# Altium PCB BtPS-250.PcbDoc (part 2 of 2)
Units mm, origin at the board's own origin, x right, y up, seen from the top; angles counter-clockwise.
Board outline 165 x 92.4 mm, 2 copper layers (Top Layer, Bottom Layer); 145 components, 82 nets, 422 pads, 41 vias.
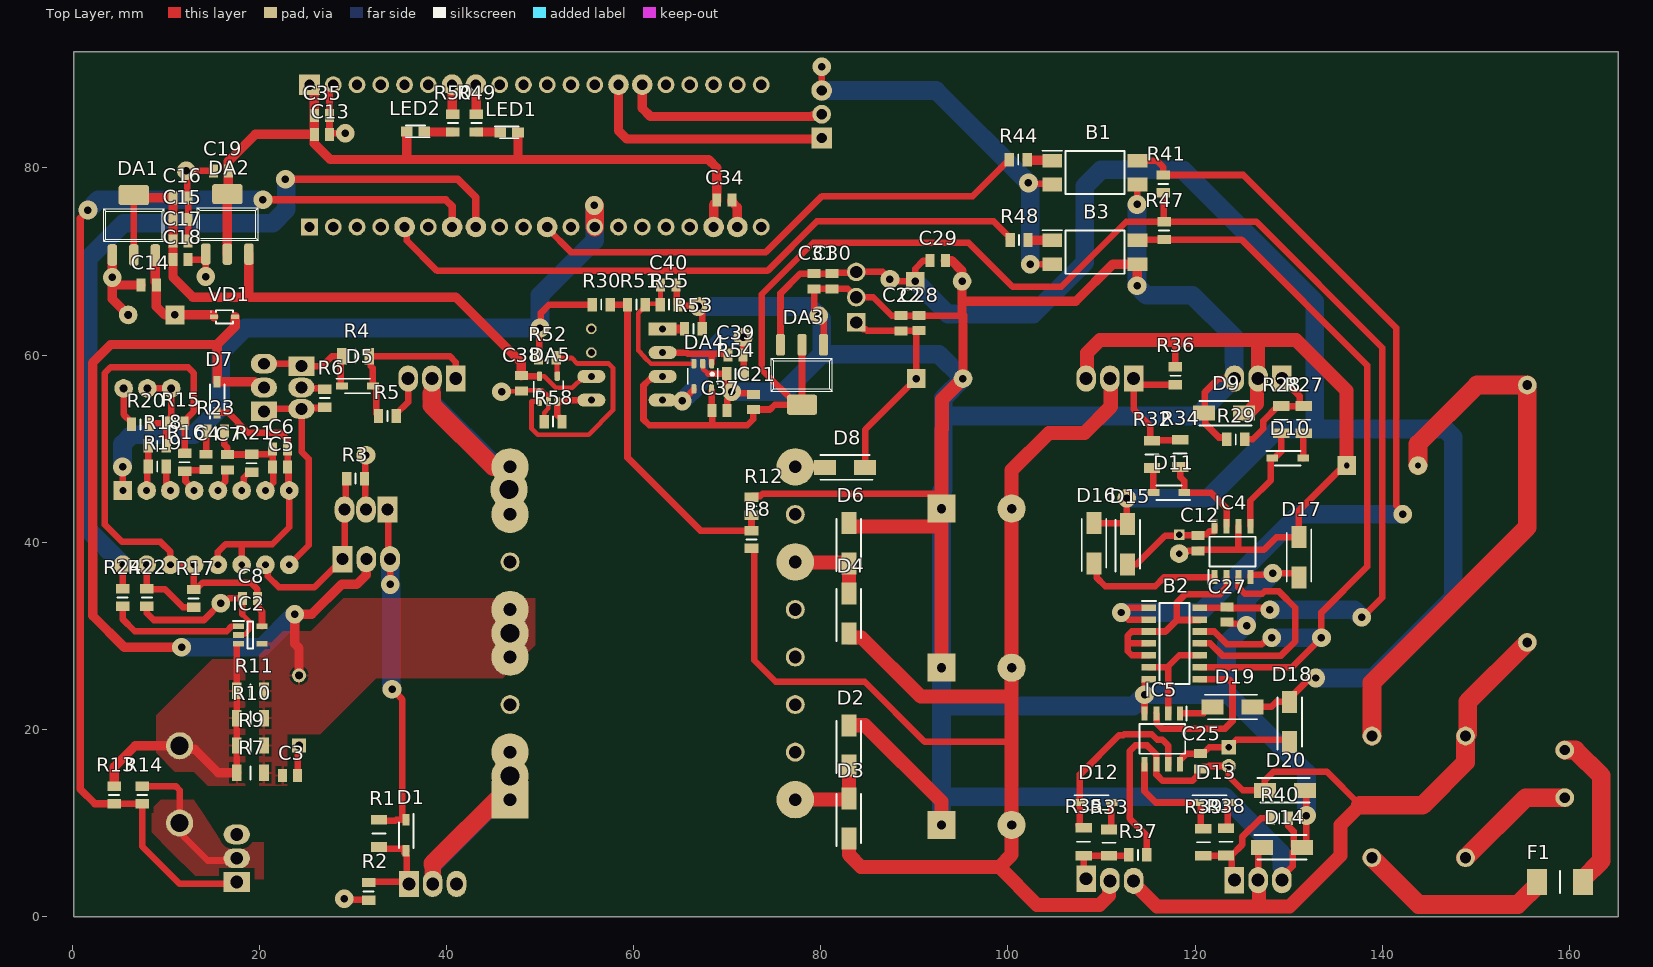
[diagram p0: Top Layer view]

## Via types
v1: diameter 2, hole 0.8, Top Layer to Bottom Layer, 41 vias

## Nets (pads, with @x,y where several pads share a name; then routed paths per layer and width w, separated by ;. In a path a pad name is that pad's centre, name@x,y a point inside that pad or via, vN(x,y) a via of type N, cw(c..) or ccw(c..) an arc to the next point about the centre after c; other vN are vias at no path point) (continued)
NetIC2_3: (continued)
  Top Layer w1: R13.2 4.5,16 6.76,18.26 J2.2 11.863,17.897 13.103,17.897 15.633,15.367 R7.1
NetIC6_1: IC6.1 R53.2 | length 2.6
  Top Layer w1: IC6.1 63.21,62.71 63.41,62.71 63.32,62.8 R53.2
NetJ1_2: J1.2 L1.3 | length 13.3
  Top Layer w2: L1.3 155.32,12.72 J1.2
NetJ2_1: J2.1 Q7.2 R14.1 | length 16.1
  Top Layer w0.7: R14.1 11.061,13.95 11.5,13.511 J2.1 11.958,9.542 11.958,8.542 14.5,6 17.36,6 Q7.2
NetJ3_1: J3.1 X2.14 | length 27
  Top Layer w1: X2.14 58.39,83.979 59.269,83.1 80,83.1 J3.1
NetJ3_2: J3.2 X2.15 | length 22.2
  Top Layer w1: X2.15 60.93,86.379 61.809,85.5 79.153,85.5 79.269,85.616 79.976,85.616 J3.2
NetLED1_1: LED1.1 R49.1 | length 2.6
  Top Layer w1: R49.1 45.7,83.85 LED1.1
NetLED2_1: LED2.1 R50.1 | length 3.1
  Top Layer w1: LED2.1 37.7,83.85 R50.1
NetQ2_2: pad.4 Q2.2 U1.1 U1.2 | length 32
  Top Layer w1.8: Q2.2 38.545,3.505 38.545,5.645
  Top Layer w2: 38.545,5.645 pad.4@46.1,13.2 ; U1.1 pad.4@46.8,14.2 ; pad.4 U1.2
  Bottom Layer w1.8: Q2.2 38.54,5.54
  Bottom Layer w2: 38.54,5.54 46.417,13.417 46.417,14.657 pad.4
NetQ5_2: pad.2 Q5.2 U1.7 U1.8 | length 27.7
  Top Layer w1.8: 38.45,55.9 38.45,57.49 Q5.2
  Top Layer w2: 38.45,55.9 38.45,54.65 45.035,48.065 46.795,48.065 U1.8
  Bottom Layer w1.8: 38.46,54.94 Q5.2
  Bottom Layer w2: 38.46,54.94 45.335,48.065 46.795,48.065 U1.8
NetQ7_1: Q7.1 R13.1 R14.2 X1.7 | length 127.7
  Top Layer w0.7: R13.1 R14.2 7.5,7.5 11.5,3.5 17.4,3.5 Q7.1
  Top Layer w0.8: v1(1.7,75.5) 1.7,75.403 0.9,74.603 0.9,13.6 2.45,12.05 R13.1 ; v1(20.4,76.6) 39.907,76.6 40.61,75.897 X1.7
  Bottom Layer w2: v1(1.7,75.5) 2.8,76.6 v1(20.4,76.6)
NetQ8_1: Q8.1 R27.2 R28.2 R29.2 | length 11.9
  Top Layer w0.7: R29.2 126.151,51.001 127.275,52.125 127.275,52.975 128.85,54.55 R28.2 R27.2@131.2,54.55 ; Q8.1 131.2,55.58 131.2,54.725 131.375,54.55 R27.2
NetQ9_1: Q9.1 R32.2 R34.2 R36.2 | length 14.9
  Top Layer w0.7: Q9.1 Q9.1@113.44,56.85 ; R32.2@115.3,50.95 115.2,51.05 115.2,52.44 113.44,54.2 Q9.1@113.44,56.85 ; R32.2 R32.2@115.4,50.95 ; R32.2@115.45,50.9 118.35,50.9 R34.2 ; R36.2 Q9.1@113.44,56.85
NetQ10_1: Q10.1 R33.2 R35.2 R37.2 | length 7.4
  Top Layer w0.7: Q10.1 108.1,4.306 R35.2 R33.2 112.8,6.5 R37.2
NetQ11_1: Q11.1 R38.2 R39.2 R40.2 | length 11.6
  Top Layer w0.7: R39.2 120.9,6.525 123.275,6.525 R38.2 ; R38.2@123.625,6.55 123.9,6.275 123.9,4.2 Q11.1 ; R38.2@123.911,6.55 125.025,7.664 125.025,8.51 127.015,10.5 R40.2
NetR8_1: R8.1 R12.2 R30.1 R51.1 | length 36.6
  Top Layer w0.7: R30.1 57.55,65.4 R51.1 59.35,49.05 67.15,41.25 R8.1@72.375,41.25 ; R8.1 72.9,41.25 72.85,41.25 72.6,41.5 R12.2
NetR15_1: R15.1 R18.2 R20.2 R25.1 R25.2 | length 10.7
  Top Layer w0.7: R25.2 R25.1 10.59,53.465 10.05,52.925 R15.1 ; R20.2 8.35,52.7 R15.1 ; R18.2 R15.1
NetR44_1: R44.1 X1.11 | length 54.7
  Top Layer w0.7: X1.11 50.77,73.548 53.312,71.006 74.146,71.006 80.14,77 96.25,77 R44.1
NetR48_1: R48.1 X1.5 | length 70.6
  Top Layer w0.7: X1.5 35.755,73.47 35.755,72.245 39,69 63.633,69 63.678,69.045 65.342,69.045 65.387,69 74.3,69 79.6,74.3 98.475,74.3 100.1,72.675 100.1,72.45 R48.1
NetR49_2: R49.2 X2.8 | length 3.2
  Top Layer w1: X2.8 43.175,88.875 43.175,85.75 R49.2
NetR50_2: R50.2 X2.7 | length 3.2
  Top Layer w1: X2.7 40.61,85.75 R50.2
REF: C8.2 IC1.13 IC1.14 IC2.5 R15.2 R16.2 R17.2 | length 61.6
  Top Layer w0.7: R16.2 12.032,52.461 12.2,52.629 12.2,53.175 13.011,53.986 13.011,58.085 12.396,58.7 4.115,58.7 3.5,58.085 3.5,41.9 5.355,40.045 9.455,40.045 10.508,38.992 IC1.14 IC1.13 13.024,37.575 13.024,34.974 R17.2 13.225,34.95 13.975,35.7 19.095,35.7 19.81,34.985 19.81,33.089 20.3,32.599 IC2.5
V_sens: IC1.1 R30.2 R52.2 X1.13 | length 86.8
  Top Layer w0.7: v1(5.4,48.05) 5.414,48.036 5.414,45.553 IC1.1 ; R52.2 49.925,59.775 49.925,62.825 v1(50,62.9) 50.1,63 50.1,64.5 51,65.4 55.353,65.4 R30.2
  Top Layer w2: v1(55.8,76) 55.85,75.95 X1.13
  Bottom Layer w2: v1(5.4,48.05) 5.4,50.5 6.4,51.5 13,51.5 15.9,54.4 15.9,60.3 18.5,62.9 v1(50,62.9) 50,66.4 55.85,72.25 X1.13 55.825,73.72 55.825,75.975 v1(55.8,76)
V_SET: IC1.2 R18.1 R19.1 | length 4.8
  Top Layer w0.7: IC1.2 8.059,45.63 8.059,48.009 R19.1 R18.1
VCC: C5.2 C6.2 D7.1 IC1.8 IC1.11 IC1.12 | length 30.7
  Top Layer w0.7: D7.1 16.717,53.85 17.634,52.933 17.634,52.866 18.8,51.7 22.285,51.7 23.048,50.937 C6.2 ; IC1.12 15.588,38.982 16.406,39.8 18.128,39.8 ; IC1.11 18.128,39.8 ; C6.2@23.048,50.193 C5.2 23.128,47.993 23.128,45.619 IC1.8 23.208,41.608 21.4,39.8 18.128,39.8
pads on no net: IC6.7 IC6.8 U1.3 U1.6 U1.10 U1.12 U1.13 U1.14 U1.15 X1.1 X1.2 X1.3 X1.4 X1.6 X1.9 X1.10 X1.12 X1.14 X1.15 X1.16 X1.17 X2.3 X2.4 X2.5 X2.6 X2.9 X2.10 X2.11 X2.12 X2.13 X2.16 X2.17 X2.18 X2.19 X2.20

## Polygon pours and split planes (outlines as drawn)
GND on Bottom Layer "NONET_L-01_P-001" (solid, remove dead copper, pour order 0): 83.1,92.4 0.1,92.4 0,92.3 0,0 53.2,0 53.2,48.7 56.7,52.2 56.7,67.6 59.9,70.8 75.3,70.8 83.1,78.6
NetJ2_1 on Bottom Layer "NONET_L-01_P-001" (solid, pour order 3): 9.5,12.5 8.5,11.5 8.5,9 10.5,7 13.5,4 20.5,4 20.5,7.932 16,7.932 14,11 13.022,12.5
BAT_+ on Top Layer "NONET_L-01_P-001" (solid, pour order 5): 20,14 23,14 23,19.5 26.5,19.5 32.5,25.5 46,25.5 49.5,29 49.5,34 29,34 25.5,30.5 22.5,30.5 20,28
NetIC2_3 on Top Layer "NONET_L-01_P-001" (solid, pour order 4): 9,17.5 11,15.5 13,15.5 14.5,14 18.5,14 18.5,27.5 15,27.5 9,21.5
NetJ2_1 on Top Layer "NONET_L-01_P-001" (solid, pour order 1): 9.5,12.5 8.5,11.5 8.5,9 10.5,7 13.5,4 20.5,4 20.5,7.932 16,7.932 14,11 13.022,12.5

## Silkscreen, mask and mechanical layers (free items; w line width, h text height)
Mechanical 1:
  the board outline again, w0.254
Bottom Assembly:
  lines w0.2: 23,88.64 23,73.4 76.368,73.913 ; 23.141,88.615 76.509,89.128 ; 76.5,73.9 76.5,89.14
  lines w0.254: 23,69.4 76.34,69.4 76.34,92.4 23,92.4 23,69.4

## Dimensions
0.2,0 to 0.2,92.4 on Dimensions
0.2,0 to 165.2,0 on Dimensions